# Altium PCB CU100_V1.0.PcbDoc
Units mm, origin at the board's own origin, x right, y up, seen from the top; angles counter-clockwise.
Board outline 100 x 85 mm, 2 copper layers (Top Layer, Bottom Layer); 31 components, 23 nets, 103 pads, 29 vias.
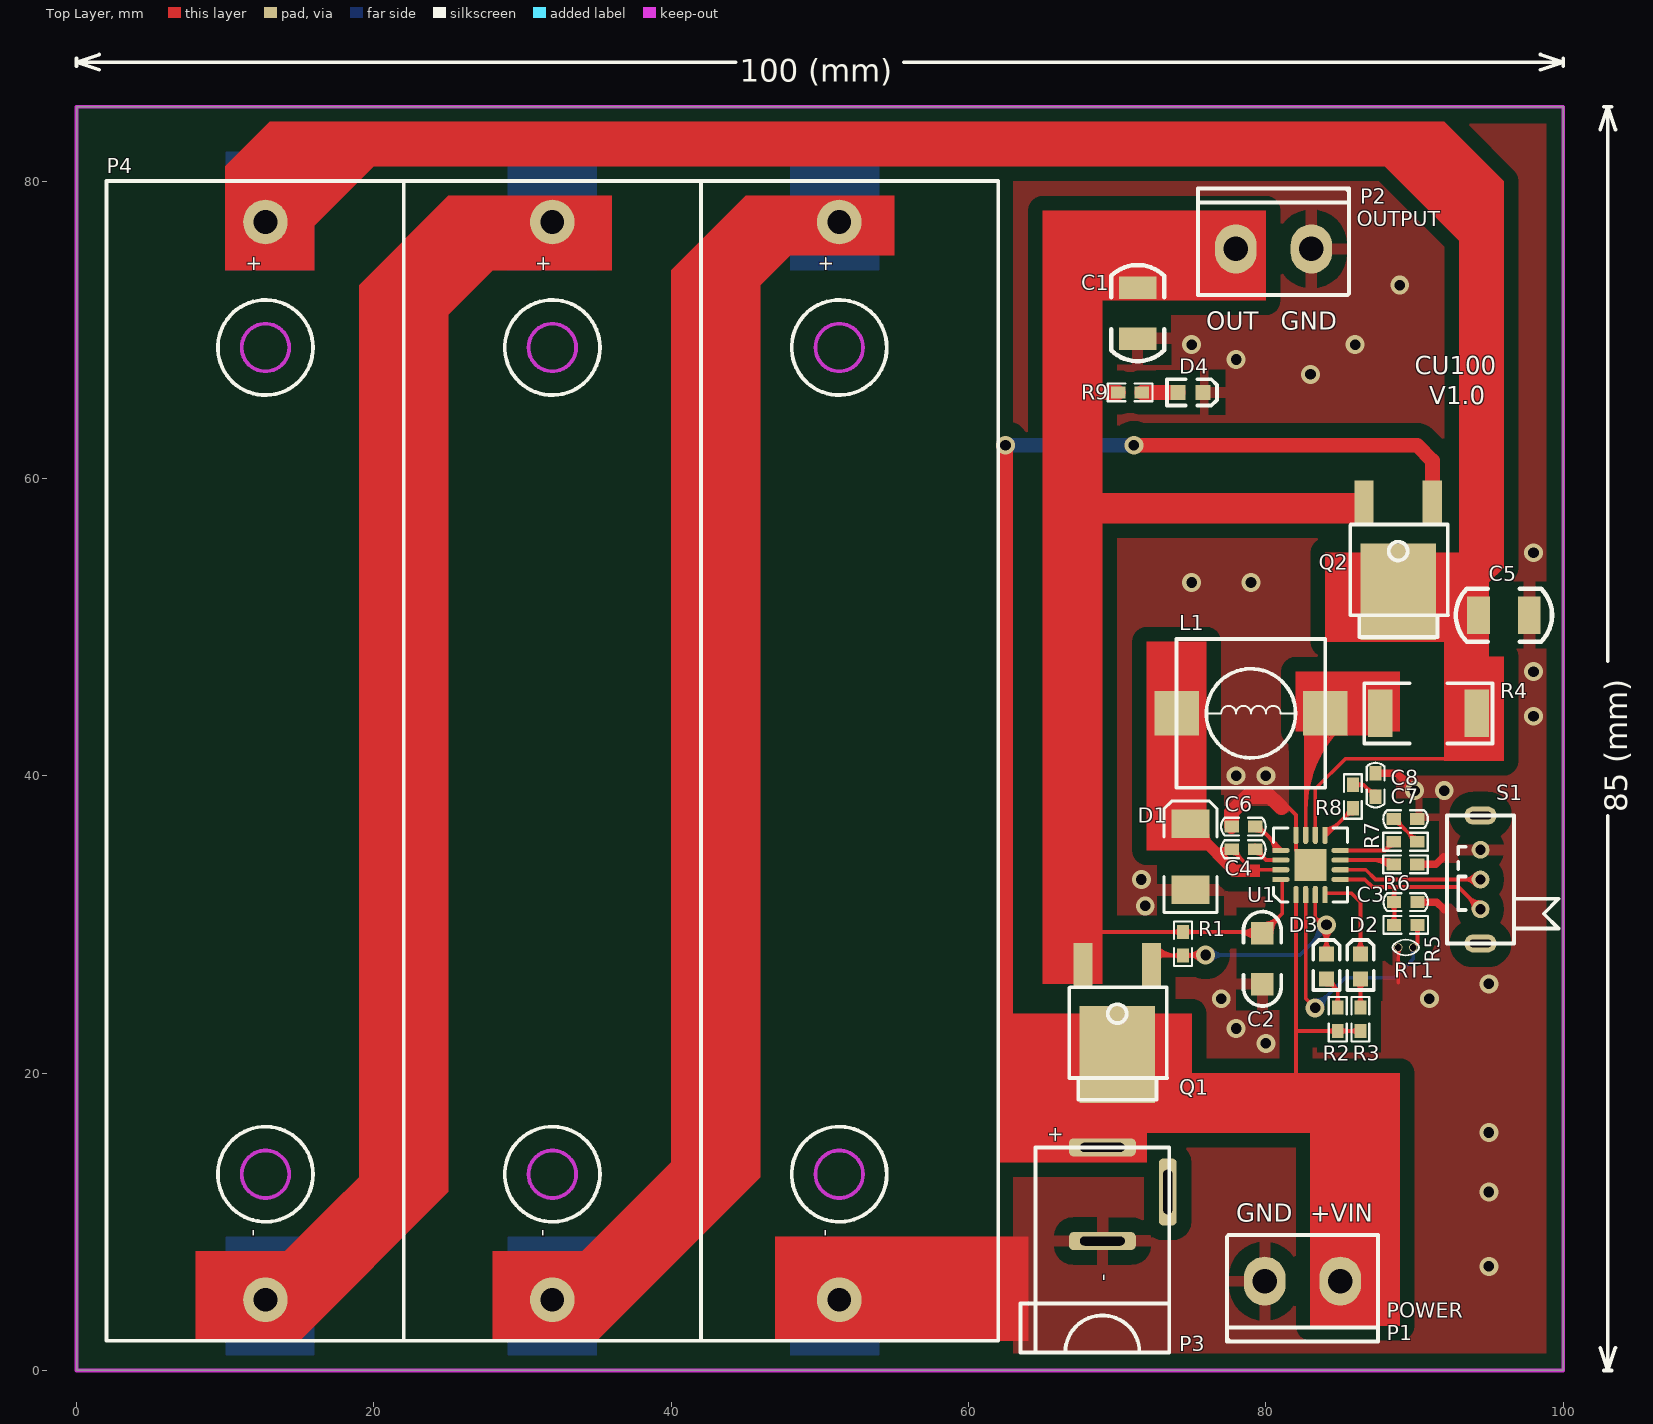
[diagram p0: Top Layer view]
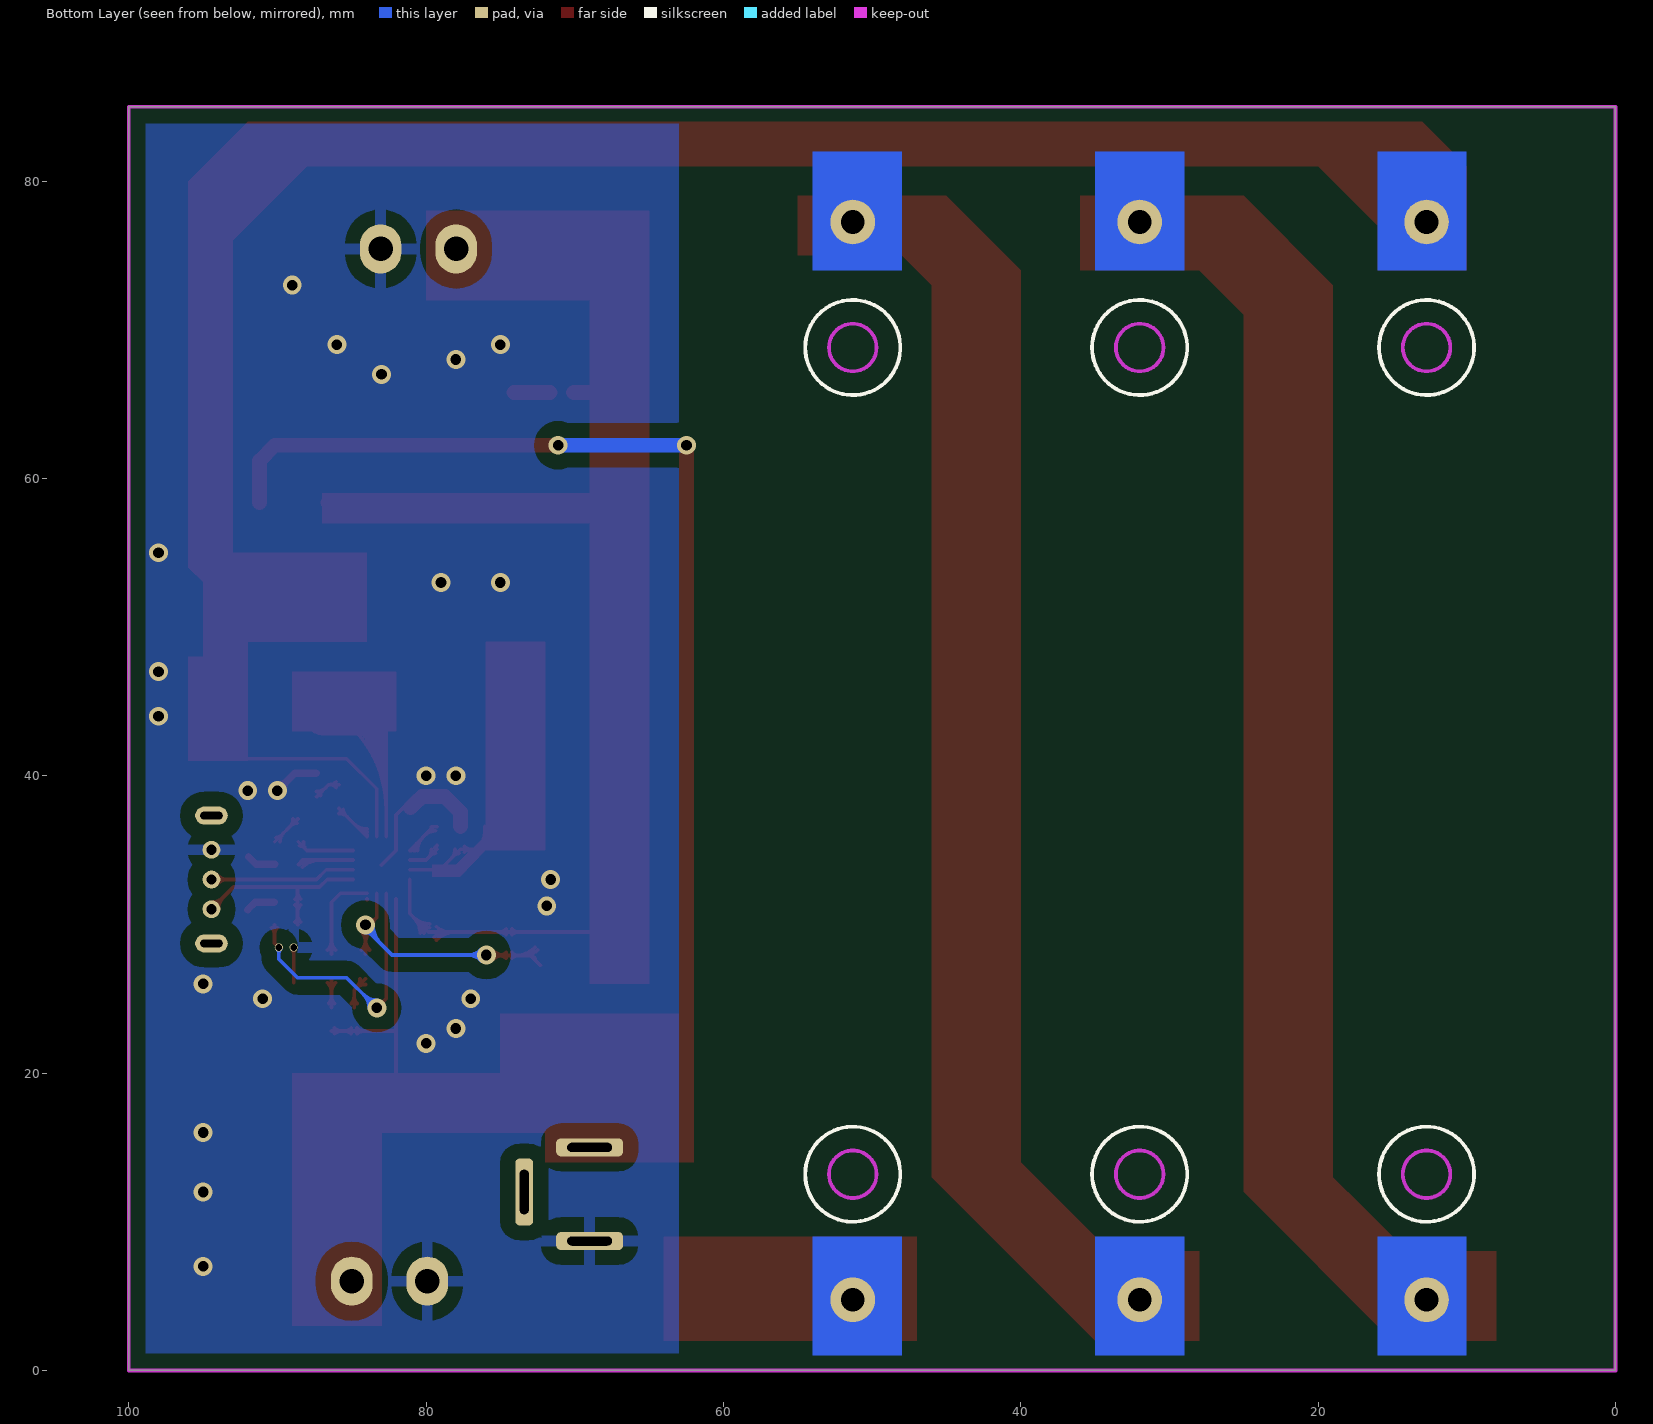
[diagram p1: Bottom Layer view, seen from below]

## Layer stack, top to bottom
Top Layer: signal copper 0.0356
Dielectric: dielectric 0.32, FR-4, Dk 4.8
Bottom Layer: signal copper 0.0356

## Board outline
0,0 100,0 100,85 0,85

## Design rules (kind name [scope] priority, off if disabled: settings)
Clearance [All] p1: gap=0.254
HoleSize [All] p1: absolutevalues=TRUE maxlimit=25.4 minlimit=0.025 maxpercent=80.000 minpercent=20.000
MinimumSolderMaskSliver [All] p1: minsoldermaskwidth=0
PolygonConnect isvia [isvia] p1: connectstyle=Direct reliefconductorwidth=0.254 reliefentries=4 polygonreliefangle="90 Angle"
PolygonConnect [All] p2: connectstyle=Relief reliefconductorwidth=0.762 reliefentries=4 polygonreliefangle="90 Angle"
RoutingVias [All] p1: holewidth=0.711 width=1.27 viastyle="Through Hole" minholewidth=0.711 minwidth=1.27 maxholewidth=0.711 maxwidth=1.27
SilkToSilkClearance [All] p1: silktosilkclearance=0
SilkscreenOverComponentPads [All] p1: minsilkscreentomaskgap=0
SolderMaskExpansion [All] p1: expansion=0.102
Width [All] p1: maxlimit=100 minlimit=0.254 preferedwidth=0.254
24 further rules are at their usual default settings.

## Components (designator, comment, footprint, x,y, rotation, side; value= is the part's Value field where it differs from the comment)
C1 "22uF/25V" 1210_C 71.374,71.12 r270 top
C2 "4.7uF/50V" 1206_C 79.756,27.686 r270 top
C3 "1uF/50V" 0603_CN 89.408,31.496 r0 top
C4 "100nF" 0603_CN 78.486,35.052 r0 top
C5 "22uF/25V" 1210_C 96.012,50.8 r0 top
C6 "100nF" 0603_CN 78.486,36.576 r180 top
C7 "2.2nF" 0603_CN 89.392,37.084 r0 top
C8 "2.2nF" 0603_CN 87.376,39.37 r90 top
D1 "SS14" DO-214AC(SMA) 74.93,34.544 r270 top
D2 "Green" 0603_LED 86.36,27.178 r270 top
D3 "Red" 0603_LED 84.074,27.178 r270 top
D4 "Red" 0603_LED 74.93,65.786 r180 top
L1 "4.7uH" CDRH104 78.994,44.196 r0 top
P1 "POWER" KF5.08-2P 85,6 r180 top locked
P2 "OUTPUT" KF5.08-2P 77.978,75.438 r0 top locked
P3 "DC-005" DC-5.5-2.1mm 69,15 r90 top locked
P4 "18650_3CELLS_THM" 18650_3CELLS_THM 2,80 r270 top locked
Q1 "AOD409" TO-252 70,24 r180 top
Q2 "AOD409" TO-252 88.9,55.118 r180 top
R1 "10K" 0603_RN 74.422,28.702 r90 top
R2 "3K" 0603_RN 84.836,23.622 r90 top
R3 "3K" 0603_RN 86.36,23.622 r270 top
R4 "0.1R/1W" 2512_R 90.932,44.196 r0 top
R5 "10K/1%" 0603_RN 89.408,29.972 r180 top
R6 "0R/NC" 0603_RN 89.392,34.036 r180 top
R7 "2.49K/1%" 0603_RN 89.392,35.56 r180 top
R8 "750R/1%" 0603_RN 85.852,38.608 r270 top
R9 "3K" 0603_RN 70.866,65.786 r0 top
RT1 "10K/1%" RT3950K 89.408,28.448 r180 top
S1 "SK12D07VG3" SK12D07VG3 94.488,33.02 r90 top
U1 "MP26123DR" QFN16(4X4) 83,34 r90 top

## Footprints (in the part's own frame and the unit in brackets; to place one, negate y for a bottom-side part, rotate by r counter-clockwise, add the part's x,y. Pads: shape width x height; smd on the part's side, far side on the other; paste and mask are expansions set on the pad)
0603_CN [mm] "SMD Resistor"
  rect 0.96x0.8 smd: 1(-0.79,0) 2(0.79,0)
  silkscreen extent -1.5,-0.6 1.5,0.6
0603_LED [mil] "SMD LED"
  rect 40x40 smd: A(33,0) K(-33,0)
  silkscreen extent -70,-35 63,35
0603_RN [mm] "SMD Resistor"
  rect 0.96x0.8 smd: 1(-0.79,0) 2(0.79,0)
  silkscreen extent -1.5,-0.6 1.5,0.6
1206_C [mil] "SMD Capacitor"
  rect 60x60 smd: 1(-67.5,0) 2(67.5,0)
  silkscreen extent -125,-50 125,50
1210_C [mil] "SMD Capacitor"
  rect 60x100 smd: 1(-67.5,0) 2(67.5,0)
  silkscreen extent -127,-70 127,70
2512_R [mm] "SMD Resistor"
  rect 1.65x3.2 smd: 1(-3.24,0) 2(3.24,0)
  silkscreen extent -4.32,-2.03 4.32,2.03
18650_3CELLS_THM [mm]
  round 3 hole 1.6: 1(2.75,10.7) 2(75.25,10.7) 3(2.75,30) 4(75.25,30) 5(2.75,49.3) 6(75.25,49.3)
  Keep-Out Layer circle w0.254: c66.805,49.3 r1.6
  Keep-Out Layer circle w0.254: c66.805,30 r1.6
  Keep-Out Layer circle w0.254: c66.805,10.7 r1.6
  Keep-Out Layer circle w0.254: c11.195,10.7 r1.6
  Keep-Out Layer circle w0.254: c11.195,30 r1.6
  Keep-Out Layer circle w0.254: c11.195,49.3 r1.6
  silkscreen extent 0,0 78,60
CDRH104 [mm] "SMD Power Inductance,L=10mm,W=10mm,H=4.2mm"
  rect 3x3 smd: 1(-5,0) 2(5,0)
  silkscreen extent -5,-5 5,5
DC-5.5-2.1mm [mm]
  rrect50% 1.2x4.5 hole 0.6 slot 3 at 90 deg: 1(0,0) 2(-6.3,0)
  rrect50% 4.5x1.2 hole 0.6 slot 3 at 0 deg: 3(-3,-4.4)
  silkscreen extent -13.8,-4.5 0,5.5
DO-214AC(SMA) [mil] "SMD Diode"
  rect 75x100 smd: A(87.5,0) K(-87.5,0)
  silkscreen extent -147,-70 148,70
KF5.08-2P [mil]
  oval 110x130 hole 65: 1(0,0) 2(200,0)
  silkscreen extent -100,-122 300,160
QFN16(4X4) [mm]
  rect 0.5x0.35 smd: 1(-2.3,0.975) 2(-2.3,0.325) 3(-2.3,-0.325) 4(-2.3,-0.975) 9(2.3,-0.975) 10(2.3,-0.325) 11(2.3,0.325) 12(2.3,0.975)
  oval 1x0.35 smd: 1(-1.9,0.975) 2(-1.9,0.325) 3(-1.9,-0.325) 4(-1.9,-0.975) 9(1.9,-0.975) 10(1.9,-0.325) 11(1.9,0.325) 12(1.9,0.975)
  rect 0.35x0.5 smd: 5(-0.975,-2.3) 6(-0.325,-2.3) 7(0.325,-2.3) 8(0.975,-2.3) 13(0.975,2.3) 14(0.325,2.3) 15(-0.325,2.3) 16(-0.975,2.3)
  oval 0.35x1 smd: 5(-0.975,-1.9) 6(-0.325,-1.9) 7(0.325,-1.9) 8(0.975,-1.9) 13(0.975,1.9) 14(0.325,1.9) 15(-0.325,1.9) 16(-0.975,1.9)
  rect 2.16x2.16 smd: PAD(0,0)
  silkscreen extent -2.5,-2.5 2.5,2.5
RT3950K [mm]
  round 0.55 hole 0.45: 1(-0.5,0) 2(0.5,0)
  silkscreen extent -0.88,-0.53 0.88,0.53
SK12D07VG3 [mm]
  oval 1.2x2.2 hole 0.5 slot 1.5 at 90 deg: 0(-4.3,0.05) 0(4.3,0.05)
  round 1.2 hole 0.7: 1(-2,0.05) 2(0,0.05) 3(2,0.05)
  silkscreen extent -4.3,-5.2 4.3,2.3
TO-252 [mm] "SMD IC"
  rect 1.3x3 smd: 1(-2.3,-3.245) 3(2.3,-3.245)
  rect 5.08x6.5 smd: 2(0,2.75)
  silkscreen extent -3.35,-1.78 3.22,5.79

## Part data
C1 C2 C3 C4 C5 C6 C7 C8: library part Cap1
D1: library part Diode-A, "SS14,SS24,SS34,M7"
D2 D3 D4: library part LED
L1: library part Inductor
P1 P2: library part "Header 2", "Header, 2-Pin"
R1 R2 R3 R4 R5 R6 R7 R8 R9: library part Res1
RT1: library part RT, "Thermistor"

## Via types
v1: diameter 1.27, hole 0.711, Top Layer to Bottom Layer, 29 vias

## Nets (pads, with @x,y where several pads share a name; then routed paths per layer and width w, separated by ;. In a path a pad name is that pad's centre, name@x,y a point inside that pad or via, vN(x,y) a via of type N, cw(c..) or ccw(c..) an arc to the next point about the centre after c; other vN are vias at no path point)
+BATT: C5.1 P4.1 Q2.2 R4.2 U1.10 | length 238.2
  Top Layer w0.254: U1.10@83.325,35.9 83.325,36.3 83.325,39.129 85.344,41.148 93.218,41.148 94.234,42.164 94.172,42.226 ; Q2.2 90.468,50.8 C5.1 ; 92.764,50.8 cw(c92.764,49.267) 93.848,50.351 ccw(c92.764,49.267) 92.764,50.8 ; 92.764,50.8 ccw(c92.764,52.333) 93.848,51.249 cw(c92.764,52.333) 92.764,50.8 ; 93.378,50.8 cw(c93.378,49.88) 94.028,50.531 ccw(c93.378,49.88) 93.378,50.8 ; 93.378,50.8 ccw(c93.378,51.72) 94.028,51.069 cw(c93.378,51.72) 93.378,50.8 ; 94.172,42.226 cw(c94.846,42.226) 94.515,42.813 ccw(c94.846,42.226) 94.172,42.226 ; 94.172,42.226 ccw(c93.498,42.226) 93.829,42.813 cw(c93.498,42.226) 94.172,42.226 ; 94.172,42.226 R4.2 94.172,50.675 C5.1 ; 94.172,46.043 cw(c93.1,46.043) 93.858,45.285 ccw(c93.1,46.043) 94.172,46.043 ; 94.172,46.043 ccw(c95.244,46.043) 94.486,45.285 cw(c95.244,46.043) 94.172,46.043 ; 94.172,46.656 cw(c92.487,46.656) 93.678,45.465 ccw(c92.487,46.656) 94.172,46.656 ; 94.172,46.656 ccw(c95.857,46.656) 94.666,45.465 cw(c95.857,46.656) 94.172,46.656 ; C5.1 cw(c94.297,54.475) 91.039,52.775 ccw(c94.297,54.475) C5.1 ; Q2.2@89.463,51.952 ccw(c91.363,52.944) 91.363,50.8 cw(c91.363,52.944) Q2.2@89.463,51.952 ; Q2.2@89.688,52.069 ccw(c91.783,53.163) 91.783,50.8 cw(c91.783,53.163) Q2.2@89.688,52.069 ; Q2.2@89.913,52.187 ccw(c92.202,53.381) 92.202,50.8 cw(c92.202,53.381) Q2.2@89.913,52.187 ; Q2.2@90.138,52.304 ccw(c92.621,53.6) 92.621,50.8 cw(c92.621,53.6) Q2.2@90.138,52.304 ; Q2.2@90.247,50.311 cw(c91.428,49.13) 91.428,50.8 ccw(c91.428,49.13) Q2.2@90.247,50.311 ; Q2.2@90.364,52.422 ccw(c93.04,53.819) 93.04,50.8 cw(c93.04,53.819) Q2.2@90.364,52.422 ; Q2.2@90.427,50.131 cw(c92.041,48.517) 92.041,50.8 ccw(c92.041,48.517) Q2.2@90.427,50.131 ; Q2.2@90.589,52.54 ccw(c93.459,54.038) 93.459,50.8 cw(c93.459,54.038) Q2.2@90.589,52.54 ; Q2.2@90.606,49.952 cw(c92.654,47.904) 92.654,50.8 ccw(c92.654,47.904) Q2.2@90.606,49.952 ; Q2.2@90.814,52.657 ccw(c93.878,54.257) 93.878,50.8 cw(c93.878,54.257) Q2.2@90.814,52.657 ; C5.1@93.848,49.843 cw(c93.067,49.062) 94.172,49.062 ccw(c93.067,49.062) C5.1@93.848,49.843 ; 94.172,48.456 cw(c96.134,48.456) 94.747,49.843 ccw(c96.134,48.456) 94.172,48.456 ; 94.172,49.069 cw(c95.52,49.069) 94.567,50.023 ccw(c95.52,49.069) 94.172,49.069
  Top Layer w1: P4.1 17.45,82 91,82 94.297,78.702 C5.1 ; 14.407,78.957 cw(c12.7,80.664) 12.7,78.25 ccw(c12.7,80.664) 14.407,78.957 ; 14.407,78.957 ccw(c16.114,77.25) 13.7,77.25 cw(c16.114,77.25) 14.407,78.957
+VIN: P1.1 P3.1 Q1.2 Q2.1 R2.1 R3.2 U1.1 | length 244.2
  Top Layer w0.254: Q1.2@69,20.25 Q1.2 ; 82,17.78 82.025,17.805 82.025,22.871 ; U1.1@82.025,31.7 82.025,22.871 ; R2.1@84.643,22.639 ccw(c84.177,22.173) 84.177,22.832 ccw(c84.177,23.491) R2.1@84.643,23.025 ; R2.1@85.029,22.639 cw(c85.495,22.173) 85.495,22.832 cw(c85.495,23.491) R2.1@85.029,23.025 ; R3.2@86.167,22.639 ccw(c85.701,22.173) 85.701,22.832 ccw(c85.701,23.491) R3.2@86.167,23.025 ; R3.2 R2.1 82.064,22.832 82.025,22.871
  Top Layer w1: v1(62.484,62.23) 62.484,21.082 65.786,17.78 69,17.78 ; P3.1 69,17.78 ; Q1.2@69,20.25 69,17.78 ; v1(71.12,62.23) 90.17,62.23 91.2,61.2 Q2.1 ; P1.1 85,15.838 83.058,17.78 82,17.78 69,17.78 ; Q1.2@68.558,19.098 cw(c67.489,18.029) Q1.2@69,18.029 ; Q1.2@68.558,19.098 cw(c67.489,18.029) Q1.2@69,18.029 ; Q1.2@68.558,19.098 cw(c67.489,18.029) Q1.2@69,18.029 ; Q1.2@68.558,19.098 cw(c67.489,18.029) Q1.2@69,18.029 ; Q1.2@68.558,19.098 cw(c67.489,18.029) Q1.2@69,18.029 ; Q1.2@68.558,19.098 cw(c67.489,18.029) Q1.2@69,18.029 ; 85,8.42 cw(c82.834,8.42) 84.366,6.888 ccw(c82.834,8.42) 85,8.42 ; 85,8.42 ccw(c87.166,8.42) 85.634,6.888 cw(c87.166,8.42) 85,8.42 ; Q1.2@67.907,18.447 ccw(c69.517,20.057) 69.517,17.78 cw(c69.517,20.057) Q1.2@67.907,18.447 ; Q1.2@68.614,19.154 ccw(c71.931,22.471) 71.931,17.78 cw(c71.931,22.471) Q1.2@68.614,19.154 ; P3.1@69,14.911 cw(c73.692,14.911) 71.119,18.834 ccw(c73.692,14.911) P3.1@69,14.911 ; 69,16.762 cw(c72.478,16.762) 70.57,19.67 ccw(c72.478,16.762) 69,16.762 ; Q1.2@69.321,19.861 ccw(c74.346,24.886) 74.346,17.78 cw(c74.346,24.886) Q1.2@69.321,19.861 ; Q1.2@70.028,20.568 ccw(c76.76,27.3) 76.76,17.78 cw(c76.76,27.3) Q1.2@70.028,20.568 ; Q1.2@70.735,21.275 ccw(c79.174,29.714) 79.174,17.78 cw(c79.174,29.714) Q1.2@70.735,21.275 ; Q1.2@71.442,21.983 ccw(c81.588,32.128) 81.588,17.78 cw(c81.588,32.128) Q1.2@71.442,21.983
  Bottom Layer w1: v1(62.484,62.23) v1(71.12,62.23)
+VREF33: C3.1 R5.2 S1.1 U1.5 | length 17.8
  Top Layer w0.254: U1.5@84.9,33.025 85.3,33.025 86.653,33.025 87.166,32.512 88.646,32.512 ; R5.2@88.425,30.165 ccw(c87.891,30.699) 88.646,30.699 ; C3.1@88.425,31.303 cw(c87.891,30.769) 88.646,30.769 ; C3.1@88.425,31.689 ccw(c87.891,32.223) 88.646,32.223 ; R5.2 88.646,30 88.646,32.512 ; 88.646,30.563 ccw(c89.209,30.563) R5.2@88.811,30.165 ; 88.646,30.905 cw(c89.209,30.905) C3.1@88.811,31.303 ; 88.646,32.087 ccw(c89.209,32.087) C3.1@88.811,31.689 ; S1.1@93.965,31.02 ccw(c92.823,31.02) 93.631,31.827 ccw(c94.438,32.635) S1.1@94.438,31.493 ; S1.1 92.946,32.512 88.646,32.512
+VSYS: C1.1 C2.1 P2.1 Q1.3 Q2.3 R1.2 R9.1 U1.16 | length 119.6
  Top Layer w0.254: 67.7,65.278 67.954,65.024 ; 67.728,29.492 R1.2 79.858,29.492 81.1,30.734 U1.16@81.1,33.025 ; R1.2@74.229,29.299 ccw(c73.763,28.833) 73.763,29.492 ccw(c73.763,30.151) R1.2@74.229,29.685 ; R1.2@74.615,29.299 cw(c75.081,28.833) 75.081,29.492 cw(c75.081,30.151) R1.2@74.615,29.685 ; C2.1@79.756,29.781 ccw(c79.756,30.727) C2.1@80.424,30.058 ; C2.1@79.756,30.036 ccw(c79.756,31.594) 80.858,30.492 ; C2.1@80.137,29.401 cw(c81.031,29.401) C2.1@80.399,30.033 ; C2.1@80.391,29.401 cw(c81.899,29.401) 80.833,30.467 ; 78.002,29.492 cw(c78.002,27.647) 79.307,28.951 ccw(c78.002,27.647) 78.002,29.492 ; 78.444,29.492 ccw(c78.444,30.713) 79.307,29.85 cw(c78.444,30.713) 78.444,29.492 ; 78.615,29.492 cw(c78.615,28.26) 79.487,29.131 ccw(c78.615,28.26) 78.615,29.492
  Top Layer w1: Q1.3 67.7,65.278 67.7,66 ; 68.011,58.363 Q2.3 ; R9.1 67.914,65.786 67.7,66 ; C1.1 71.628,73.088 71.628,75.438 ; P2.1 71.628,75.438 ; 67.7,66 67.7,73.796 69.342,75.438 71.628,75.438 ; 75.812,75.438 cw(c75.812,73.272) 77.344,74.804 ccw(c75.812,73.272) 75.812,75.438 ; 75.812,75.438 ccw(c75.812,77.604) 77.344,76.072 cw(c75.812,77.604) 75.812,75.438 ; C1.1@71.189,73.02 ccw(c70.128,74.08) 71.628,74.08 cw(c70.128,74.08) C1.1@71.189,73.02
GND: C1.2 C2.2 C3.2 C5.2 C6.2 C7.2 C8.2 D1.A D4.K P1.2 P2.2 P3.2 P4.6 R6.1 RT1.2 S1.3 U1.12 U1.PAD | length 22.6
  Top Layer w0.254: 80.518,38.354 80.54,38.354 81.026,38.354 81.788,37.592 ; 81.534,37.846 81.788,37.592 ; U1.PAD 82.025,34.975 82.025,35.9 82.025,36.3 82.025,37.355 81.788,37.592 ; RT1.2@88.803,28.343 cw(c88.551,28.091) 88.908,28.091 cw(c89.265,28.091) RT1.2@89.013,28.343 ; 88.908,26.092 RT1.2
  Top Layer w0.5: C8.2 88.84,40.16 v1(90,39) ; v1@89.615,39 ccw(c88.686,39) 89.343,39.657 ccw(c90,40.314) v1@90,39.385 ; R6.1 91.44,34.036 91.948,34.544 ; C3.2 91.504,31.496 92,31
  Top Layer w1: C6.2 77.696,37.564 78.74,38.608 80.264,38.608 80.518,38.354 ; 80.54,38.354 81.048,37.846
  other v1: 95,7 95,12 95,16 80,22 78,23 77,25 91,25 95,26 71.882,31.242 71.628,33.02 92,39 78,40 80,40 98,44 98,47 75,53 79,53 98,55 83,67 78,68 75,69 86,69 89,73
NetC4_1: C4.1 D1.K L1.1 U1.15 | length 39.1
  Top Layer w0.254: D1.K 76.644,35.052 C4.1 79.073,33.675 80.7,33.675 U1.15@81.1,33.675 ; C4.1@77.423,34.859 ccw(c76.957,34.393) 76.957,35.052 ccw(c76.957,35.711) C4.1@77.423,35.245 ; C4.1@77.776,34.779 cw(c77.776,34.313) 78.105,34.643 ; C4.1@78.049,35.052 ccw(c78.901,35.052) 78.299,34.449 ; D1.K@75.248,35.941 cw(c75.248,34.715) 76.115,35.582 ccw(c75.248,34.715) D1.K@75.248,35.941 ; D1.K@75.559,36.706 ccw(c76.455,36.532) 75.81,35.887 cw(c76.455,36.532) D1.K@75.559,36.706 ; D1.K@75.809,36.658 ccw(c77.021,36.422) 76.148,35.549 cw(c77.021,36.422) D1.K@75.809,36.658 ; D1.K@76.058,36.609 ccw(c77.587,36.312) 76.486,35.211 cw(c77.587,36.312) D1.K@76.058,36.609
  Top Layer w1: L1.1 73.994,37.703 D1.K ; 73.994,41.782 cw(c76.408,41.782) 74.701,43.489 ccw(c76.408,41.782) 73.994,41.782 ; 73.994,41.782 ccw(c71.58,41.782) 73.287,43.489 cw(c71.58,41.782) 73.994,41.782 ; 73.994,39.352 ccw(c77.198,39.352) 74.932,37.086 cw(c77.198,39.352) 73.994,39.352
NetC4_2: C4.2 U1.14 | length 3.3
  Top Layer w0.254: C4.2 80.003,34.325 80.7,34.325 U1.14@81.1,34.325 ; C4.2@79.276,35.306 C4.2@79.403,35.179 ; C4.2@79.356,34.779 cw(c79.356,34.313) 79.685,34.643 ; C4.2@79.629,35.052 ccw(c80.481,35.052) 79.879,34.449
NetC6_1: C6.1 U1.13 | length 6
  Top Layer w0.254: C6.1 79.499,36.576 U1.13@81.1,34.975 ; C6.1@79.356,36.303 cw(c79.356,35.299) 80.066,36.009 ; C6.1@79.629,36.576 ccw(c79.943,36.576) C6.1@79.721,36.354 ; 80.207,35.868 cw(c79.314,34.975) U1.13@80.577,34.975 ; 80.463,35.612 cw(c79.827,34.975) U1.13@80.727,34.975 ; 80.641,35.434 cw(c80.182,34.975) U1.13@80.831,34.975 ; 80.897,35.178 cw(c80.694,34.975) U1.13@80.981,34.975
NetC7_1: C7.1 R7.1 | length 4.3
  Top Layer w0.254: C7.1 88.658,37.084 R7.1 ; C7.1@88.682,36.811 cw(c88.682,36.21) 89.107,36.635 ; C7.1@88.955,37.084 ccw(c89.672,37.084) 89.165,36.577 ; 89.579,36.163 cw(c88.977,35.56) R7.1@89.829,35.56 ; 89.773,35.969 ccw(c90.102,36.299) R7.1@90.102,35.833
NetC8_1: C8.1 R8.1 | length 3.9
  Top Layer w0.254: R8.1 86.558,39.398 C8.1 ; R8.1@86.045,39.205 cw(c86.511,38.739) 86.511,39.398 cw(c86.511,40.057) R8.1@86.045,39.591 ; 86.773,39.183 ccw(c87.376,39.785) C8.1@87.376,38.933 ; 86.967,38.989 cw(c86.637,38.66) C8.1@87.103,38.66
NetD2_A: D2.A R3.1 | length 5.9
  Top Layer w0.254: R3.1@86.167,24.685 ccw(c85.701,25.151) 86.36,25.151 ccw(c87.019,25.151) R3.1@86.553,24.685 ; R3.1 D2.A ; 86.36,25.42 cw(c87.28,25.42) 86.629,26.07 ccw(c87.28,25.42) 86.36,25.42 ; 86.36,25.42 ccw(c85.44,25.42) 86.091,26.07 cw(c85.44,25.42) 86.36,25.42
NetD2_K: D2.K U1.4 | length 9
  Top Layer w0.254: U1.4@83.975,31.671 U1.4@83.975,31.7 ; U1.4@83.975,32.1 84.994,32.1 85.756,32.1 86.36,31.496 D2.K ; 86.36,28.936 cw(c85.44,28.936) 86.091,28.286 ccw(c85.44,28.936) 86.36,28.936 ; 86.36,28.936 ccw(c87.28,28.936) 86.629,28.286 cw(c87.28,28.936) 86.36,28.936
NetD3_A: D3.A R2.2 | length 4.7
  Top Layer w0.254: D3.A@84.074,25.959 cw(c84.074,25.039) 84.724,25.689 cw(c85.375,26.34) D3.A@84.455,26.34 ; D3.A 84.836,25.578 R2.2 ; R2.2@84.643,24.685 ccw(c84.177,25.151) 84.836,25.151 ccw(c85.495,25.151) R2.2@85.029,24.685
NetD3_K: D3.K Q1.1 R1.1 U1.3 | length 34.8
  Top Layer w0.254: Q1.1 72.967,27.912 ; Q1.1@72.49,28.285 ccw(c73.391,29.186) 73.391,27.912 ; Q1.1@72.67,27.725 cw(c73.121,27.274) 73.121,27.912 ; Q1.1@72.67,28.465 ccw(c74.004,29.799) 74.004,27.912 ; R1.1@74.229,27.719 ccw(c73.763,27.253) 73.763,27.912 ccw(c73.763,28.571) R1.1@74.229,28.105 ; R1.1@74.615,27.719 cw(c75.081,27.253) 75.081,27.912 cw(c75.081,28.571) R1.1@74.615,28.105 ; R1.1@74.652,27.912 ccw(c74.652,29.234) v1@75.587,28.299 ; R1.1@74.787,27.912 cw(c74.787,26.781) v1@75.587,27.581 ; 75.265,27.912 ccw(c75.265,28.621) v1@75.766,28.12 ; v1@75.918,27.912 R1.1 72.967,27.912 ; 83.325,30.988 U1.3@83.325,31.7 ; U1.3@83.325,32.1 U1.3@83.325,31.7 ; v1@83.568,30.019 ccw(c83.168,30.056) 83.452,30.34 ccw(c83.588,30.476) v1@83.721,30.338 ; v1@83.715,29.613 cw(c82.848,28.746) 84.074,28.746 cw(c85.3,28.746) v1@84.433,29.613 ; D3.K@83.805,28.286 ccw(c83.154,28.936) 84.074,28.936 ccw(c84.994,28.936) D3.K@84.343,28.286 ; D3.K 84.074,29.718 83.325,30.467 U1.3@83.325,31.7 ; 72.967,27.912 ccw(c72.967,27.611) 72.723,27.788 cw(c72.967,27.611) 72.967,27.912
  Bottom Layer w0.254: v1(75.946,27.94) 82.296,27.94 v1@84.074,29.718 ; v1@76.305,27.581 cw(c77.172,26.714) 77.172,27.94 cw(c77.172,29.166) v1@76.305,28.299 ; 83.027,28.671 ccw(c81.726,29.972) v1@83.566,29.972 ; 83.461,29.105 ccw(c82.594,29.972) v1@83.82,29.972 ; 83.64,29.284 cw(c84.074,28.851) v1@84.074,29.464
  other v1: 84.074,29.972
NetD4_A: D4.A R9.2 | length 2.4
  Top Layer w1: R9.2 D4.A
NetL1_2: L1.2 R4.1 U1.11 | length 49.6
  Top Layer w0.254: U1.11@82.675,35.9 82.675,36.3 82.675,42.877 L1.2 ; 82.675,37.697 cw(c90.493,37.697) L1.2@84.965,43.225 ; 82.675,38.31 cw(c89.88,38.31) L1.2@84.785,43.405 ; 82.675,38.923 cw(c89.267,38.923) L1.2@84.606,43.584 ; 82.675,39.537 cw(c88.653,39.537) L1.2@84.426,43.764 ; 82.675,40.15 cw(c88.04,40.15) L1.2@84.246,43.944 ; 82.675,40.763 cw(c87.427,40.763) L1.2@84.067,44.123 ; 82.675,41.376 cw(c86.814,41.376) L1.2@83.887,44.303 ; 82.675,41.989 cw(c86.201,41.989) L1.2@83.708,44.482 ; 82.675,42.603 cw(c85.587,42.603) L1.2@83.528,44.662
  Top Layer w3: L1.2 R4.1@86.868,44.196
NetP4_2: P4.2 P4.3 | length 104.1
  Top Layer w1: P4.3 27.72,77.25 22.098,71.628 22.098,12.954 13.894,4.75 P4.2 ; P4.2 ccw(c12.7,7.633) 14.738,5.594 cw(c12.7,7.633) P4.2 ; 29.586,77.25 cw(c29.586,74.836) 31.293,76.543 ccw(c29.586,74.836) 29.586,77.25 ; 29.586,77.25 ccw(c29.586,79.664) 31.293,77.957 cw(c29.586,79.664) 29.586,77.25 ; P4.2@12.7,5.75 ccw(c12.7,11.047) 16.445,7.301 cw(c12.7,11.047) P4.2@12.7,5.75
NetP4_4: P4.4 P4.5 | length 119.1
  Top Layer w1: P4.5 47.532,77.25 42.164,71.882 42.164,12.954 33.96,4.75 ; P4.4 ccw(c32,9.482) 35.346,6.136 cw(c32,9.482) P4.4 ; P4.4 33.96,4.75 ; 33.96,4.75 cw(c33.96,6.171) 32.81,5.337 ccw(c33.96,6.171) 33.96,4.75 ; 33.96,4.75 ccw(c33.96,3.329) 32.81,4.163 cw(c33.96,3.329) 33.96,4.75 ; 48.886,77.25 cw(c48.886,74.836) 50.593,76.543 ccw(c48.886,74.836) 48.886,77.25 ; 48.886,77.25 ccw(c48.886,79.664) 50.593,77.957 cw(c48.886,79.664) 48.886,77.25 ; P4.4@32,3.75 ccw(c32,6.068) 33.639,4.429 cw(c32,6.068) P4.4@32,3.75 ; P4.4@32,5.75 ccw(c32,12.896) 37.053,7.843 cw(c32,12.896) P4.4@32,5.75
NetR5_1: R5.1 RT1.1 U1.2 | length 22.5
  Top Layer w0.254: 82.675,26.545 82.675,27.178 ; U1.2@82.675,32.1 82.675,31.7 82.675,27.178 ; v1(83.312,24.384) 82.675,25.021 82.675,27.178 ; RT1.1 90.198,28.738 R5.1 ; R5.1@90.005,29.779 cw(c89.539,29.313) 90.198,29.313 cw(c90.857,29.313) R5.1@90.391,29.779
  Bottom Layer w0.254: v1(83.312,24.384) 83.82,24.892 85.344,26.416 88.646,26.416 89.908,27.678 RT1.1 RT1.1@89.916,28.44 ; v1@83.312,24.892 ccw(c83.312,26.118) 84.179,25.251 ccw(c85.046,24.384) v1@83.82,24.384 ; RT1.1@89.803,28.343 cw(c89.551,28.091) 89.908,28.091 cw(c90.265,28.091) RT1.1@90.013,28.343
NetR6_2: R6.2 U1.7 | length 5.9
  Top Layer w0.254: U1.7@84.9,34.325 85.3,34.325 88.313,34.325 R6.2 ; 87.165,34.325 cw(c87.165,32.679) R6.2@88.329,33.843 ; 87.778,34.325 cw(c87.778,33.292) R6.2@88.509,34.023
NetR7_2: R7.2 U1.8 | length 4.9
  Top Layer w0.254: U1.8@84.9,34.975 85.3,34.975 88.017,34.975 R7.2 ; 88.057,35.015 ccw(c87.586,35.486) R7.2@88.25,35.538 ; 88.193,35.151 cw(c88.522,34.821) R7.2@88.522,35.287
NetR8_2: R8.2 U1.9 | length 7.2
  Top Layer w0.254: U1.9@83.975,35.9 85.852,37.777 R8.2 ; U1.9@83.975,36.019 ccw(c83.975,36.306) 84.178,36.103 ; U1.9@83.975,36.169 ccw(c83.975,36.818) 84.434,36.359 ; U1.9@83.975,36.273 ccw(c83.975,37.173) 84.612,36.537 ; U1.9@83.975,36.423 ccw(c83.975,37.686) 84.868,36.793 ; 85.319,37.244 cw(c85.852,36.712) 85.852,37.465 ccw(c85.852,36.712) 85.319,37.244 ; 85.414,37.339 ccw(c85.014,37.738) 85.579,37.738 cw(c85.014,37.738) 85.414,37.339
NetS1_2: S1.2 U1.6 | length 11.6
  Top Layer w0.254: U1.6@84.9,33.675 85.3,33.675 86.721,33.675 87.376,33.02 S1.2 ; S1.2@94.104,32.686 ccw(c93.296,31.878) 93.296,33.02 ccw(c93.296,34.162) S1.2@94.104,33.354
pads on no net: P3.3 S1.0

## Polygon pours and split planes (outlines as drawn)
GND on Bottom Layer "Bot Layer-No Net" (solid, remove dead copper, pour order 1000): 63,84 99,84 99,81 99,1 63,1 63,84
GND on Top Layer "Bot Layer-No Net" (solid, remove dead copper, pour order 1001): 63,84 99,84 99,1 63,1 63,84

## Keep-outs
Keep-Out Layer:
  the board outline again, w0.254

## Other copper
Top Layer:
  region net GND: 47,9 64,9 64,2 47,2
  region net NetL1_2: 82,47 89,47 89,43 82,43
  region net NetC4_1: 72,49 76,49 76,36 78,34 79.6,34 79.6,33.2 77.7,33.2 76,35 72,35
  region net +VIN: 62,24 75,24 75,20 89,20 89,3 83,3 83,16 72,16 72,14 62,14
  region net +VSYS: 65,26 69,26 69,57 87,57 87,59 69,59 69,72 80,72 80,78 65,78
  region net NetP4_4: 28,8 34,8 40,14 40,74 45,79 55,79 55,75 48,75 46,73 46,13 35,2 28,2
  region net NetP4_2: 8,8 14,8 17,11 19,13 19,73 25,79 36,79 36,74 28,74 25,71 25,12 15,2 8,2
  region net +BATT: 10,74 16,74 16,77 20,81 88,81 93,76 93,55 84,55 84,49 92,49 92,41 96,41 96,48 95,48 95,53 96,54 96,80 92,84 13,84 10,81
Bottom Layer:
  rectangle net GND: 48,1 54,9
  rectangle net NetP4_4: 29,1 35,9
  rectangle net NetP4_2: 10,1 16,9
  rectangle net NetP4_4: 48,74 54,82
  rectangle net NetP4_2: 29,74 35,82
  rectangle net +BATT: 10,74 16,82

## Silkscreen, mask and mechanical layers (free items; w line width, h text height)
Top Overlay:
  lines w0.254: 0,87.746 0,88.254 ; 1.524,87.492 0,88 ; 1.524,88.508 0,88 ; 44.344,88 0,88 ; 55.656,88 100,88 ; 98.476,87.492 100,88 ; 98.476,88.508 100,88 ; 100,87.746 100,88.254 ; 102.492,1.524 103,0 ; 102.492,83.476 103,85 ; 102.746,0 103.254,0 ; 102.746,85 103.254,85 ; 103,37.301 103,0 ; 103,47.699 103,85 ; 103.508,1.524 103,0 ; 103.508,83.476 103,85
  text "100 (mm)" at 44.598,86.687 h1.52
  text "OUT" at 76,70 h1.2
  text "GND" at 81,70 h1.2
  text "CU100" at 90,67 h1.2
  text "V1.0" at 91,65 h1.2
  text "85 (mm)" at 104.313,37.555 h1.52 r90
  text "GND" at 78,10 h1.2
  text "+VIN" at 83,10 h1.2

## Text inside footprints (layer, text, board x,y; h text height)
P3: Top Overlay "-" at 69.5,6 h1 r90; Top Overlay "+" at 66.282,15.279 h1 r90
P4: Top Overlay "-" at 11.5,9.5 h1 r270; Top Overlay "-" at 31,9.5 h1 r270; Top Overlay "-" at 50,9.5 h1 r270; Top Overlay "+" at 50,75 h1 r270; Top Overlay "+" at 31,75 h1 r270; Top Overlay "+" at 11.5,75 h1 r270